# Altium PCB Tigershark 3D R2.3 - TR.PcbDoc (part 4 of 4)
Units mil, origin at the board's own origin, x right, y up, seen from the top; angles counter-clockwise.
Board outline 4100 x 4050 mil, 4 copper layers (Top Layer, Groun Plane, Power Plane, Bottom Layer), stack 61.73 mil thick; 367 components, 240 nets, 1160 pads, 805 vias.
Unrouted connection lines stored in the file: 6.
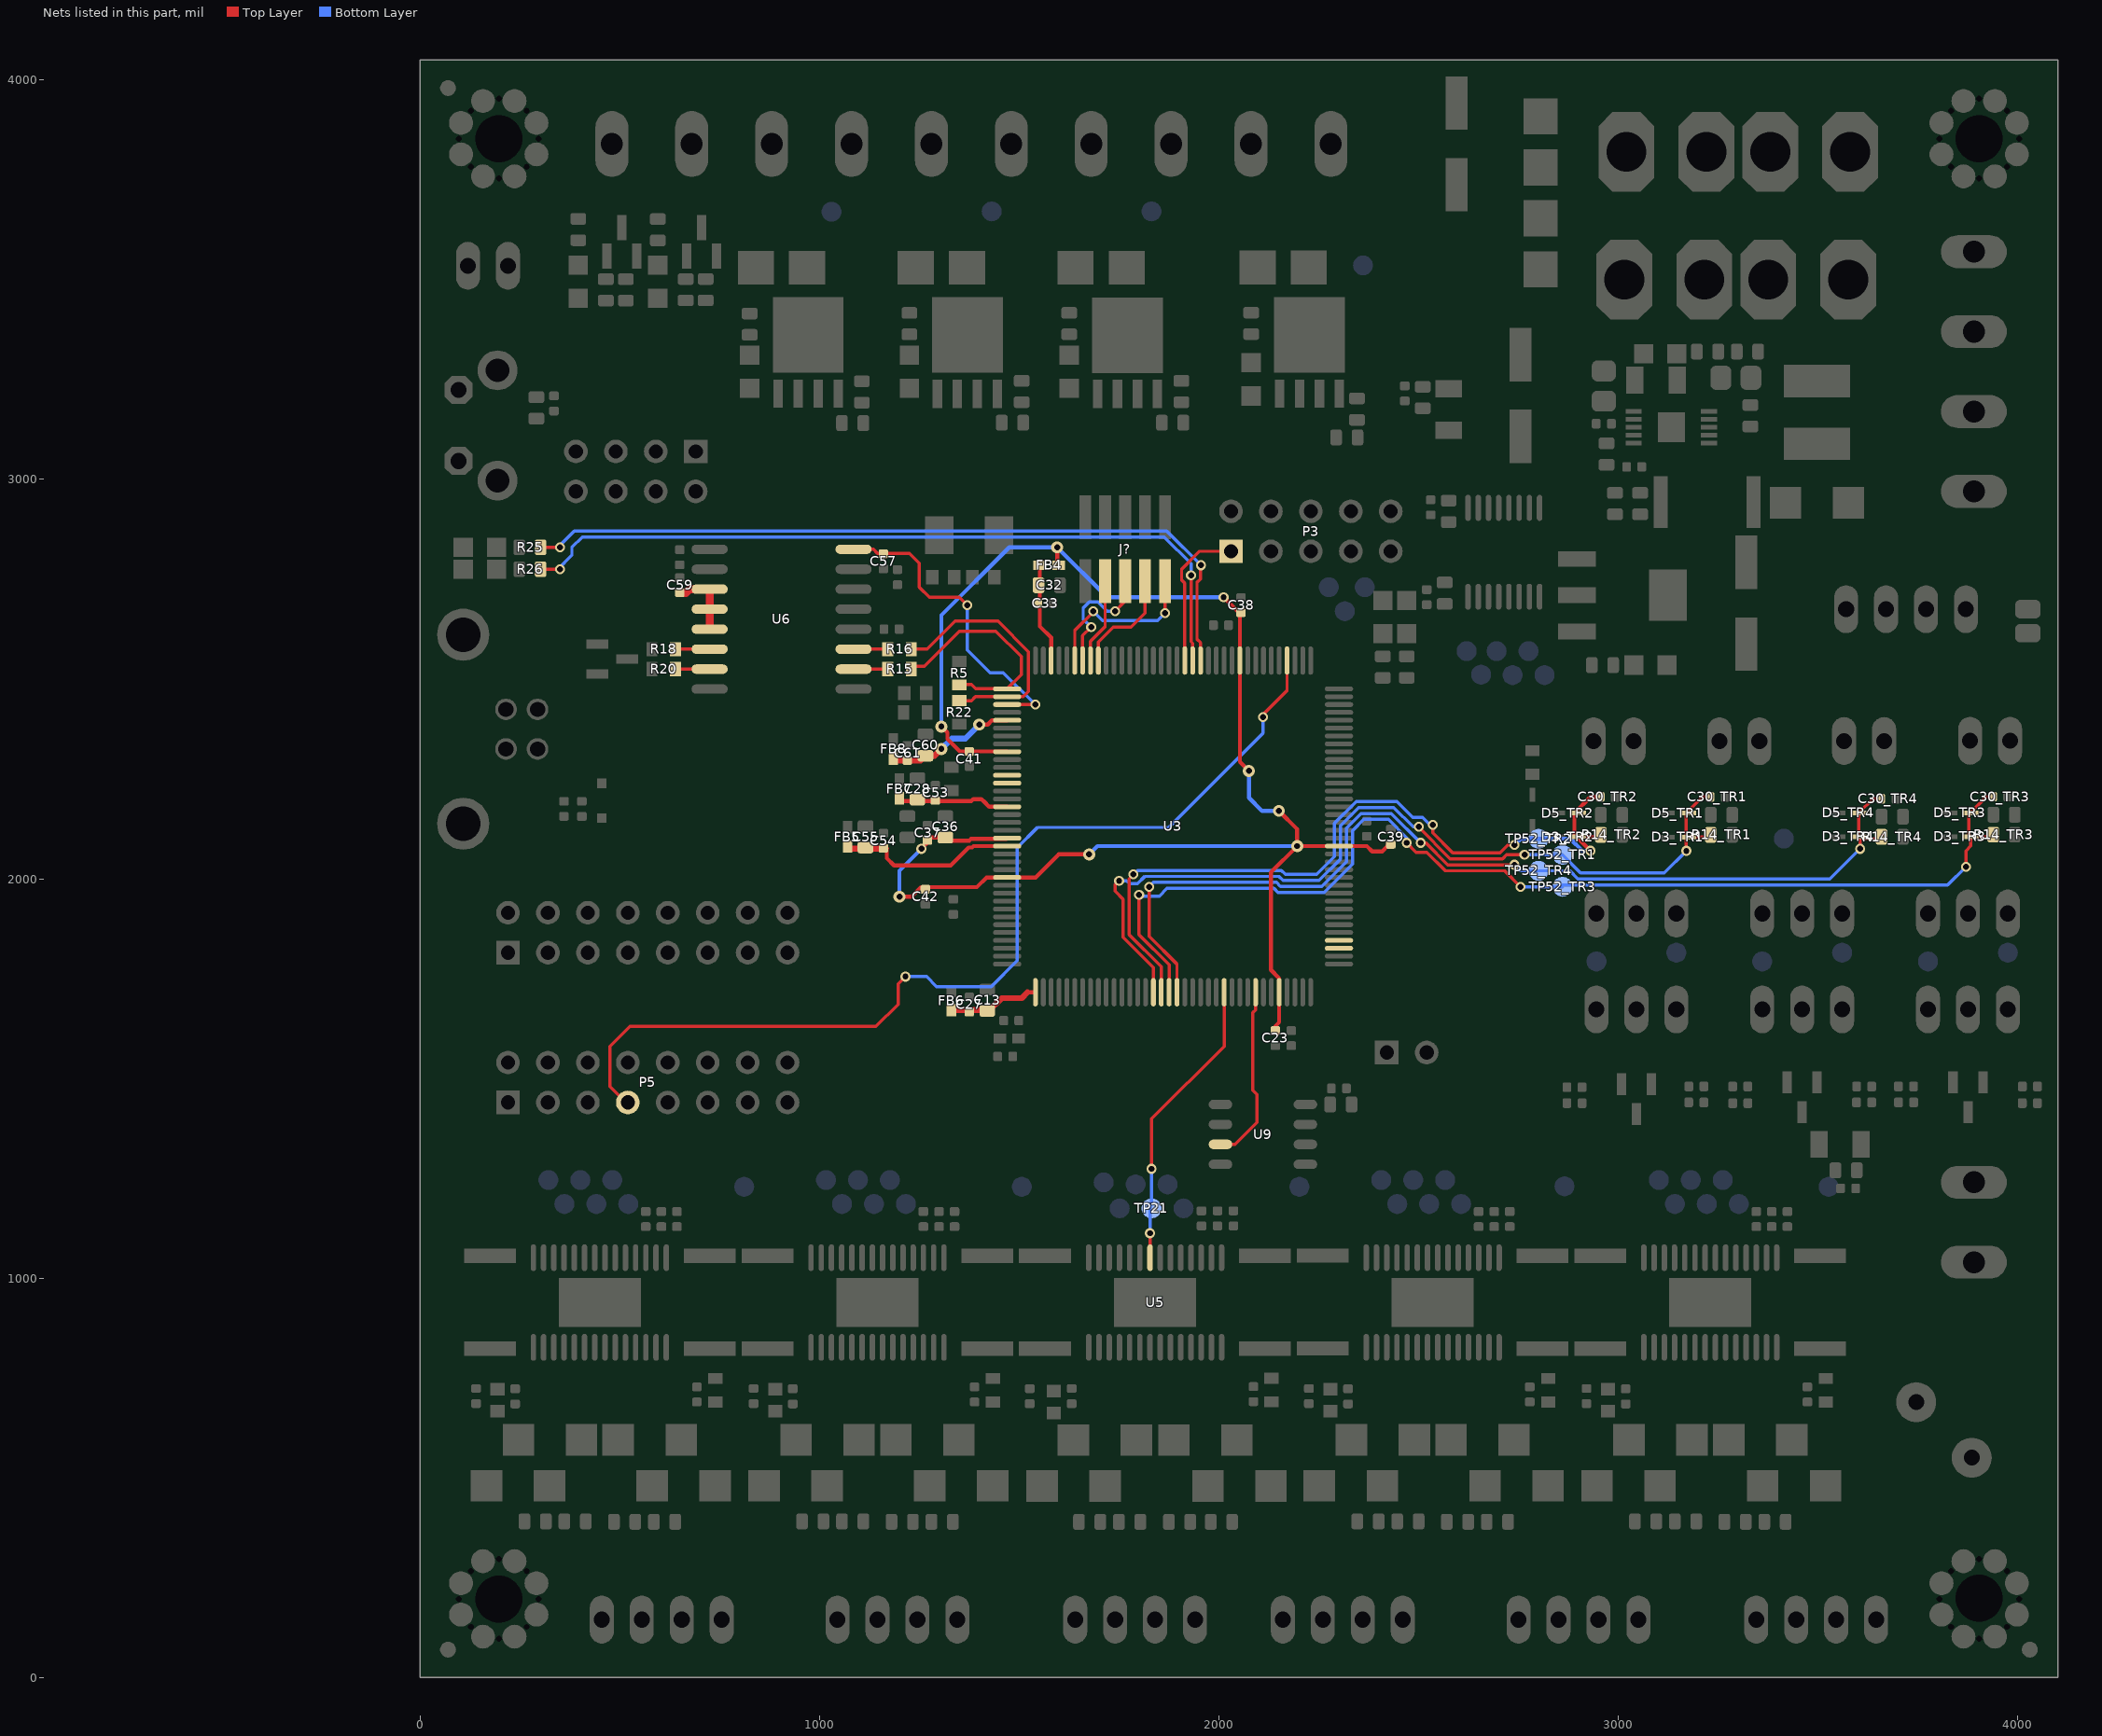
[diagram p6: the nets of this part, all layers, seen from the top]

## Via types
v1: diameter 30, hole 15, Top Layer to Bottom Layer, tented both sides, 465 vias
v2: diameter 25, hole 15, Top Layer to Bottom Layer, tented both sides, 192 vias
v3: diameter 19.68, hole 7.87, Top Layer to Bottom Layer, 75 vias
v4: diameter 25, hole 15, Top Layer to Bottom Layer, 61 vias
v5: diameter 30, hole 15, Top Layer to Bottom Layer, 9 vias
v6: diameter 45, hole 20, Top Layer to Bottom Layer, tented both sides, 2 vias
v7: diameter 25, hole 15, Top Layer to Bottom Layer, tented bottom, 1 vias

## Nets (pads, with @x,y where several pads share a name; then routed paths per layer and width w, separated by ;. In a path a pad name is that pad's centre, name@x,y a point inside that pad or via, vN(x,y) a via of type N, cw(c..) or ccw(c..) an arc to the next point about the centre after c; other vN are vias at no path point) (continued)
STEP_Z: TP21.1 U3.97 U5.22 | length 740.5
  Top Layer w8: U5.22@1827.24,1052.17 v4(1827.24,1112.61) ; v4(1831.26,1273.74) 1831.26,1398.98 2012.95,1580.67 U3.97@2012.95,1715.75
  Bottom Layer w8: v4(1827.24,1112.61) 1827.24,1181.72 1831.26,1185.74 v4(1831.26,1273.74)
TC_CS1: U3.111
TC_CS2: U3.112
TCK/SWDCLK: J?.4@1815,2745.08 U3.28 | length 273.4
  Top Layer w8: U3.28@1697.99,2546.46 1697.99,2592.99 1735,2630 1780,2630 1815,2665 J?.4@1815,2745.08
TDI: J?.8 U3.29 | length 213.8
  Top Layer w8: U3.29@1678.31,2546.46 1678.31,2594.52 1715,2631.21 J?.8@1715,2745.08
TDO/SWO: J?.6@1765,2745.08 U3.30 | length 330.4
  Top Layer w8: U3.30@1658.62,2546.46 1658.62,2608.62 v2(1680,2630) ; v2(1740,2670) 1765,2695 J?.6@1765,2745.08
  Bottom Layer w8: v2(1680,2630) 1660,2650 1660,2678.23 1675.27,2693.5 1696.5,2693.5 1720,2670 v2(1740,2670)
THERM_AN1: C30_TR1.1 D3_TR1.1 D5_TR1.2 R14_TR1.2 TP52_TR1.1 U3.88 | length 2217.3
  Top Layer w8: v2(1750,1995) 1740,1985 1740,1968.79 1760,1948.79 1760,1853.79 1835.79,1778 U3.88@1835.79,1715.75 ; v2(2500,2130) 2500,2128.79 2578.79,2050 2710,2050 2720,2060 v2(2765,2060) ; v2(3170,2070) 3169.53,2070.47 D3_TR1.1@3169.53,2104.53 ; C30_TR1.1@3229.25,2205 3210,2205 3169.53,2164.53 D3_TR1.1@3169.53,2104.53 ; R14_TR1.2@3231.18,2110 3225.71,2104.53 D3_TR1.1@3174.53,2104.53 D3_TR1.1@3169.53,2104.53
  Bottom Layer w8: v2(1750,1995) 1768.55,1995 1776.16,1987.39 1795.62,1987.39 1814.12,2005.89 2150.17,2005.89 2160.17,1995.89 2250.74,1995.89 2304.05,2049.2 2304.05,2132.84 2349.71,2178.5 2437.71,2178.5 2486.21,2130 v2(2500,2130) ; v2(2765,2060) TP52_TR1.1@2860,2060 2905,2015 3115,2015 v2(3170,2070)
THERM_AN2: C30_TR2.1 D3_TR2.1 D5_TR2.2 R14_TR2.2 TP52_TR2.1 U3.89 | length 1959.2
  Top Layer w8: v2(1785.89,2010.89) 1775,2000 1775,1860 1855.47,1779.53 U3.89@1855.47,1715.75 ; v2(2535,2135) 2535,2115 2585,2065 2703.79,2065 2723.79,2085 v2(2740,2085)
  Top Layer w10: v2(2930,2070) 2899.53,2100.47 D3_TR2.1@2899.53,2105 ; C30_TR2.1@2954.25,2205 2930,2205 2889.53,2164.53 2889.53,2105 D3_TR2.1@2899.53,2105 ; R14_TR2.2@2956.18,2110 2951.18,2105 D3_TR2.1@2899.53,2105
  Bottom Layer w8: v2(1785.89,2010.89) 1795.89,2020.89 2156.38,2020.89 2166.38,2010.89 2244.53,2010.89 2289.05,2055.41 2289.05,2139.05 2343.5,2193.5 2445.14,2193.5 2485.14,2153.5 2509.73,2153.5 2528.23,2135 v2(2535,2135)
  Bottom Layer w10: v2(2740,2085) 2755,2100 TP52_TR2.1@2800,2100 2880,2100 2910,2070 v2(2930,2070)
THERM_AN3: C30_TR3.1 D3_TR3.1 D5_TR3.2 R14_TR3.2 TP52_TR3.1 U3.90 | length 2859.3
  Top Layer w8: v2(1800,1960) 1800,1860 1875.16,1784.84 U3.90@1875.16,1715.75 ; v2(2470,2090) 2493.5,2066.5 2519.86,2066.5 2566.36,2020 2715,2020 v2(2755,1980) ; v2(3870,2030) 3870,2070 3882.05,2082.05 D3_TR3.1@3882.05,2105.47 ; R14_TR3.2@3935.94,2100.47 3930.95,2105.47 D3_TR3.1@3882.05,2105.47 ; C30_TR3.1@3936.77,2205.47 3920.94,2205.47 3877.05,2161.57 3877.05,2105.47 D3_TR3.1@3882.05,2105.47
  Bottom Layer w8: v2(1800,1960) 1803.5,1956.5 1850.61,1956.5 1870,1975.89 2137.74,1975.89 2147.74,1965.89 2263.17,1965.89 2334.05,2036.77 2334.05,2120.41 2362.14,2148.5 2424.07,2148.5 2470,2102.57 v2(2470,2090) ; v2(2755,1980) TP52_TR3.1@2860,1980 2860,1984.03 3824.03,1984.03 v2(3870,2030)
THERM_AN4: C30_TR4.1 D3_TR4.1 D5_TR4.2 R14_TR4.2 TP52_TR4.1 U3.91 | length 2518.4
  Top Layer w8: v2(1825,1980) 1825,1856.21 1894.84,1786.37 U3.91@1894.84,1715.75 ; v2(2505,2090) 2517.57,2090 2572.57,2035 v2(2740,2035) ; D3_TR4.1@3601.38,2105.47 3601.38,2139.33 3601.97,2139.92 D5_TR4.2@3601.97,2160.47 ; D3_TR4.1@3602.05,2105.47 D3_TR4.1@3602.05,2100.47 ; D5_TR4.2@3602.05,2165 3637.52,2200.47 C30_TR4.1@3656.77,2200.47 ; v2(3605,2075) 3605,2097.52 D3_TR4.1@3602.05,2100.47 ; R14_TR4.2@3655.94,2095.47 3650.95,2100.47 D3_TR4.1@3602.05,2100.47
  Bottom Layer w8: v2(1825,1980) 1835.89,1990.89 2143.95,1990.89 2153.95,1980.89 2256.96,1980.89 2319.05,2042.99 2319.05,2126.63 2355.93,2163.5 2431.5,2163.5 v2(2505,2090) ; v2(2740,2035) 2755,2020 TP52_TR4.1@2800,2020 2878.79,2020 2898.79,2000 2904.03,2000 2905,1999.03 3529.03,1999.03 v2(3605,2075)
TMS/SWDIO: J?.2@1865,2745.08 U3.31 | length 394.6
  Top Layer w8: U3.31@1638.94,2546.46 1638.94,2622.17 v2@1685.88,2669.12 ; v2(1865,2665) J?.2@1865,2720.08
  Bottom Layer w8: v2(1685,2670) 1708.5,2646.5 1846.5,2646.5 v2(1865,2665)
TXD0: P5.7 U3.4 | length 2534.8
  Top Layer w8: P5.7@500,1440 500,1455 475,1480 475,1580 525,1630 1141.36,1630 1197,1685.64 1197,1737 v2(1215,1755) ; v2(2110,2405) 2110,2411.21 2170.43,2471.65 U3.4@2170.43,2546.46
  Bottom Layer w8: v2(1215,1755) 1268.23,1755 1293.23,1730 1430,1730 1495,1795 1495,2077.98 1545.52,2128.5 1874.71,2128.5 2110.61,2364.39 2110,2365 v2(2110,2405)
TXD1: P3.1 U3.17 | length 374.2
  Top Layer w8: U3.17@1914.53,2546.46 1914.53,2740.47 1906.5,2748.5 1906.5,2775.29 1951.21,2820 P3.1@2030,2820
UD_N: R18.1 U6.6 | length 85.4
  Top Layer w8: R18.1@639.53,2575 U6.6@724.88,2575
UD_P: R20.1 U6.7 | length 85.4
  Top Layer w8: R20.1@639.53,2525 U6.7@724.88,2525
UI_N: R16.2 U6.11 | length 85.4
  Top Layer w8: U6.11@1085.12,2575 1135,2575 R16.2@1170.47,2575
UI_P: R15.2 U6.10 | length 85.4
  Top Layer w8: U6.10@1085.12,2525 1150,2525 R15.2@1170.47,2525
UMCU_N: R16.1 R22.1 U3.38 | length 631.4
  Top Layer w8: R16.1@1229.53,2575 1269.64,2575 1339.64,2645 1441.56,2645 1446.51,2645 1523,2568.51 1523,2468.91 1510,2455.91 U3.38@1469.65,2455.91 1390.28,2455.91 1380,2445.63 R22.1@1355,2445.63
UMCU_P: R5.1 R15.1 U3.37 | length 555.6
  Top Layer w8: R15.1@1229.53,2525 1237.03,2532.5 1262.5,2532.5 1350,2620 1441.1,2620 1505,2556.1 1505,2510.94 U3.37@1469.65,2475.59 1390.98,2475.59 1380,2486.57 R5.1@1355,2486.57
USB_RX: R25.1 U3.15 | length 1957.2
  Top Layer w8: R25.1@301.77,2830 v2(350,2830) ; U3.15@1953.9,2546.46 1953.9,2591.1 1945,2600 1945,2741.77 1953.5,2750.27 1953.5,2783.5 v2(1955,2785)
  Bottom Layer w8: v2@345,2830 386,2871 1869,2871 v2(1955,2785)
USB_TX: R26.1 U3.16 | length 1950.4
  Top Layer w8: R26.1@301.77,2775 v2(350,2775) ; v2(1930,2760) 1930,2593.79 1934.21,2589.57 U3.16@1934.21,2546.46
  Bottom Layer w8: v2@345,2775 380,2810 380,2830 406,2856 1862.79,2856 1930,2788.79 v2(1930,2760)
VBUS: C57.1 U3.39 U6.16 | length 787.2
  Top Layer w8: U6.16@1085.12,2825 1135,2825 1145,2815 1225,2815 1250,2790 1250,2730 1275,2705 1350,2705 v2(1370,2685) ; U3.39@1469.65,2436.22 v2@1540,2436.22
  Bottom Layer w8: v2(1370,2685) 1370,2572.87 1426.77,2516.1 1460,2516.1 v2(1540,2436.1)
VDD1: C59.1 U6.3 U6.4 U6.5 | length 178.6
  Top Layer w20: C59.1@650,2716 666,2716 675,2725 U6.3@724.88,2725 U6.4@724.88,2675 U6.5@724.88,2625
VDDANA: C13.2 C27.1 FB6.2 U3.73 | length 228.3
  Top Layer w10: 1520.75,1715.75 U3.73@1539.79,1715.75
  Top Layer w15: FB6.2@1330,1671.1 1426.1,1671.1 1456.1,1701.1 1506.1,1701.1 1520.75,1715.75
VDDBU: C28.2 C53.1 FB7.2 U3.52 | length 282.5
  Top Layer w10: FB7.2@1200,2201.38 1206.88,2194.5 1379.85,2194.5 1384.85,2199.5 1405.15,2199.5 1410.15,2194.5 1410.5,2194.5 1424.68,2180.32 U3.52@1469.65,2180.32
VDDIN: C54.1 C55.2 FB5.2 U3.57 | length 441.4
  Top Layer w8: C54.1@1167.77,2078.23 C54.1@1170,2076
  Top Layer w10: C54.1@1168.37,2075 1168.37,2051.63 1186.5,2033.5 1328.5,2033.5 1373.5,2078.5 1382.19,2078.5 1385.58,2081.89 U3.57@1469.65,2081.89
  Top Layer w15: FB5.2@1070,2081.38 1076.38,2075 C54.1@1153.37,2075
VDDOUT: C23.1 C36.2 C37.1 C38.1 C39.1 C41.1 C42.1 FB4.1 U3.10 U3.45 U3.56 U3.61 U3.104 U3.124 | length 4257.3
  Top Layer w10: v1(1200,1955) 1230,1955 1254,1979 1394,1979 1418.15,2003.15 U3.61@1469.65,2003.15 1540.78,2003.15 1598.73,2061.1 v1(1675,2061.1) ; v2(1255,2075) C37.1@1270,2090 ; C37.1@1270,2098.54 1270,2101 1272.23,2103.23 C36.2@1315,2103.23 1322.73,2095.5 1375.15,2095.5 1379.44,2099.8 1467.87,2099.8 U3.56@1469.65,2101.57 ; v1(1305,2381.1) 1320,2366.1 1320,2350 1351,2319 1468.76,2319 U3.45@1469.65,2318.11 ; v1(1595,2830) 1595,2788.62 FB4.1@1598.62,2785 ; v2(2011.58,2705) 2055,2661.58 2052.32,2658.9 U3.10@2052.32,2546.46 2052.32,2292.68 v1(2075,2270) ; C23.1@2141.1,1620.1 2141.1,1631.1 2150.75,1640.75 U3.104@2150.75,1715.75 2150.75,1750.91 2130,1771.66 2130,2016.1 v1(2195.79,2081.89) ; v1(2150,2170) 2195.79,2124.21 v1(2195.79,2081.89) ; C39.1@2435,2086 2423,2086 2423,2082.85 2408.65,2068.5 2383.46,2068.5 2370.07,2081.89 U3.124@2300.35,2081.89 v1(2195.79,2081.89)
  Bottom Layer w10: v1(1200,1955) 1200,2020 v2(1255,2075) ; v1(1305,2381.1) 1305,2660 1475,2830 v1(1595,2830) 1720,2705 v2(2011.58,2705) ; v1(1675,2061.1) 1695.79,2081.89 v1(2195.79,2081.89) ; v1(2075,2270) 2075,2202.68 2107.68,2170 v1(2150,2170)
VDDPLL: C32.2 C33.1 FB4.2 U3.34 | length 258.5
  Top Layer w10: FB4.2@1546.38,2791.1 1551.38,2786.1 1551.38,2632.14 1579.88,2603.63 U3.34@1579.88,2546.46
VDDUTMI: C60.2 C61.1 FB8.2 U3.41 | length 328.6
  Top Layer w10: v1(1400,2386.1) 1421.1,2386.1 1431.85,2396.85 U3.41@1469.65,2396.85
  Top Layer w15: FB8.2@1185,2301.38 1190.38,2296 1220,2296 1252.77,2296 C60.2@1265,2308.23 1288.23,2308.23 v1(1305,2325)
  Bottom Layer w15: v1(1305,2325) 1331.1,2351.1 1365,2351.1 v1(1400,2386.1)
WP#: U3.101 U9.3 | length 446.7
  Top Layer w8: U9.3@2003.7,1335 2040,1335 2095,1390 2095,1460 2085,1470 2085,1665 2091.69,1671.69 U3.101@2091.69,1715.75
XIN32: U3.48
XOUT32: U3.49
pads on no net: FD1.1 FD2.1 FD3.1 H1.0 H2.0 H3.0 H4.0 J?.7 U3.32 U3.127 U3.128 U3.129 U5.18 U5.19 U5.23 U5.27 U7_M1.18 U7_M1.19 U7_M1.23 U7_M1.27 U7_M2.18 U7_M2.19 U7_M2.23 U7_M2.27 U7_M3.18 U7_M3.19 U7_M3.23 U7_M3.27 U7_M4.18 U7_M4.19 U7_M4.23 U7_M4.27

## Polygon pours and split planes (outlines as drawn)
GND on Top Layer "Top Layer-No Net" (solid, remove dead copper, pour order 175): 2880,3030 2735,3030 2710,3055 2665,3100 2540,3100 2455,3100 2450,3100 2450,3210 2535,3210 2535,3200 2620,3200 2620,3180 2880,3180
+12VCC2 on Top Layer "Top Layer-No Net" (solid, remove dead copper, pour order 172): 3290,3350 3290,3640 3095,3640 2875,3640 2875,3595 2775,3595 2735,3595 2735,3550 2735,3510 2630,3510 2630,3450 2630,3245 2455,3245 2455,3220 2540,3220 2540,3205 2630,3205 2630,3185 2830,3185 2980,3185 2985,3190 2985,3217.71 2877.29,3217.71 2875,3220 2875,3350
+5VCC on Top Layer "Top Layer-No Net" (solid, remove dead copper, pour order 170): 2965,2775 2825,2775 2825,3020 2885,3020 2885,2880 2885,2850 2965,2850
+12VCC3 on Top Layer "Top Layer-No Net" (solid, remove dead copper, pour order 168): 3290,3650 2880,3650 2875,3655 2875,3845 2745,3845 2745,3810 2560,3810 2555,3805 2555,3670 2505,3670 2505,4030 2510,4025 3290,4025
FGND on Top Layer "Top Layer-No Net" (solid, remove dead copper, pour order 166): 3980,2630 3980,2600 3940,2600 3940,2485 4080,2485 4080,2630
GND on Top Layer "Top Layer-No Net" (solid, remove dead copper, pour order 164): 2840,2750 2840,2675 2840,2670 3075,2670 3075,2645 3170,2645 3170,2670 3455,2670 3455,2750 3500,2750 3825,2750 3825,2610 3970,2610 3965,2615 3965,2645 4080,2645 4080,3040 3735,3040 3730,3035 3730,2910 3730,2845 3070,2845 3070,2755 3075,2750
NetF1_1 on Top Layer "Top Layer-No Net" (solid, remove dead copper, pour order 160): 4080,3045 4080,3415 3815,3415 3795,3435 3690,3540 3690,3590 3690,3620 3670,3640 3595,3640 3300,3640 3300,3530 3300,3360 3300,3348.73 3595,3348.73 3606.27,3348.73 3609.65,3345.35 3730,3225 3730,3045
3.3VCC on Top Layer "Top Layer-No Net" (solid, remove dead copper, pour order 146): 2840,2660 2840,2505 2965,2505 2965,2575 3190,2575 3190,2510 3625,2510 3625,2695 3625,2740 3475,2740 3475,2660
NetF2_1 on Top Layer "Top Layer-No Net" (solid, remove dead copper, pour order 142): 3300,4030 3300,3650 3675,3650 3700,3625 3700,3545 3820,3425 4080,3425 4080,4030
GND on Top Layer "Top Layer-No Net" (solid, remove dead copper, pour order 125): 2310,3140 2280,3140 2280,3170 2280,3255 2130,3255 2130,3175 2125,3170 2050,3170 2050,3080 2215,3080 2310,3080
GND on Top Layer "Top Layer-No Net" (solid, remove dead copper, pour order 125): 1884.5,3109.19 1884.5,3169.19 1824.5,3169.19 1824.5,3254.19 1674.5,3254.19 1674.5,3174.19 1669.5,3169.19 1594.5,3169.19 1594.5,3079.19 1759.5,3079.19 1884.5,3079.19
GND on Top Layer "Top Layer-No Net" (solid, remove dead copper, pour order 125): 1483.5,3109.61 1483.5,3169.61 1423.5,3169.61 1423.5,3254.61 1273.5,3254.61 1273.5,3174.61 1268.5,3169.61 1193.5,3169.61 1193.5,3079.61 1358.5,3079.61 1483.5,3079.61
GND on Top Layer "Top Layer-No Net" (solid, remove dead copper, pour order 125): 1085,3110 1085,3170 1025,3170 1025,3255 875,3255 875,3175 870,3170 795,3170 795,3080 960,3080 1085,3080
GND on Top Layer "Mechanical 15-No Net" (solid, remove dead copper, pour order 58): 2885,1375 2885,855 3025,855 3025,875 3185,875 3390,875 3390,785 3405,770 3465,710 3495,710 3495,775 3440,775 3440,850 3575,850 3575,1375 3325,1375 3325,1150 3440,1150 3440,1005 3265,1005 3080,1005 3080,1040 3080,1375
GND on Top Layer "Mechanical 15-No Net" (solid, remove dead copper, pour order 58): 2190,1375 2190,855 2330,855 2330,875 2490,875 2695,875 2695,785 2710,770 2770,710 2800,710 2800,775 2745,775 2745,850 2880,850 2880,1375 2630,1375 2630,1150 2745,1150 2745,1005 2570,1005 2385,1005 2385,1040 2385,1375
GND on Top Layer "Top Layer-No Net" (solid, remove dead copper, pour order 112): 770,3595 725,3595 725,3525 690,3525 690,3470 740,3470 740,3425 725,3425 725,3255 790,3255 790,3340 790,3455 775,3455 775,3595
GND on Top Layer "Top Layer-No Net" (solid, remove dead copper, pour order 110): 525,3595 525,3525 490,3525 490,3485 490,3470 540,3470 540,3420 525,3420 525,3350 615,3260 620,3255 705,3255 705,3420 605,3420 565,3420 565,3595
+12VCC2 on Top Layer "Top Layer-No Net" (solid, remove dead copper, pour order 83): 1650,3390 1595,3390 1595,3460 1580,3460 1580,3495 1580,3600 1580,4030 1585,4030 1745,4030 1745,3980 1745,3695 1700,3695 1700,3595 1700,3480 1650,3480
+12VCC2 on Top Layer "Top Layer-No Net" (solid, remove dead copper, pour order 83): 1250,3390 1195,3390 1195,3460 1180,3460 1180,3495 1180,3600 1180,4030 1185,4030 1345,4030 1345,3980 1345,3695 1300,3695 1300,3595 1300,3480 1250,3480
+12VCC2 on Top Layer "Top Layer-No Net" (solid, remove dead copper, pour order 83): 850,3390 795,3390 795,3460 780,3460 780,3495 780,3600 780,4030 785,4030 945,4030 945,3980 945,3695 900,3695 900,3595 900,3480 850,3480
HTBD on Top Layer "Bottom Layer-No Net" (solid, remove dead copper, pour order 75): 2380.5,3265.81 2620.5,3265.81 2620.5,3665.81 2500.5,3665.81 2500.5,4035.81 2430.02,4030.69 2410.5,4035.81 2150.5,4035.81 2150.5,3755.81 2150.5,3480.81 2125.5,3480.81 2125.5,3325.81 2110.5,3325.81 2110.5,3260.81 2055.5,3260.81 2055.5,3180.81 2132.63,3180.81 2125.5,3180.81 2125.5,3260.81 2130.5,3265.81 2375.5,3265.81
GND on Top Layer "Bottom Layer-No Net" (solid, pour order 52): 2565,3805 2565,3670 2630,3670 2630,3605 2630,3520 2725,3520 2725,3605 2830,3605 2860,3605 2860,3710 2860,3835 2755,3835 2755,3805
GND on Top Layer "Mechanical 15-No Net" (solid, remove dead copper, pour order 58): 1495.26,1375 1495.26,855 1635.26,855 1635.26,875 1795.26,875 2000.26,875 2000.26,785 2015.26,770 2075.26,710 2105.26,710 2105.26,775 2050.26,775 2050.26,850 2185.26,850 2185.26,1375 1935.26,1375 1935.26,1150 2050.26,1150 2050.26,1005 1875.26,1005 1690.26,1005 1690.26,1040 1690.26,1375
GND on Top Layer "Mechanical 15-No Net" (solid, remove dead copper, pour order 59): 800,1375 800,855 940,855 940,875 1100,875 1305,875 1305,785 1320,770 1380,710 1410,710 1410,775 1355,775 1355,850 1490,850 1490,1375 1240,1375 1240,1150 1355,1150 1355,1005 1180,1005 995,1005 995,1040 995,1375
GND on Top Layer "Mechanical 15-No Net" (solid, remove dead copper, pour order 60): 105,1375 105,855 245,855 245,875 405,875 610,875 610,785 625,770 685,710 715,710 715,775 660,775 660,850 795,850 795,1375 545,1375 545,1150 660,1150 660,1005 485,1005 300,1005 300,1040 300,1375
GND on Top Layer "Top Layer-No Net" (solid, remove dead copper, pour order 61): 3805,1090 3805,925 3830,925 3830,905 3830,810 3830,350 3955,350 4076.06,350 4076.06,663.83 4080,670.41 4080,780 4080,915 4080,943.17 4080,1090 4080,1110 4080,1120 3805,1120 3805,1110
+12VCC1 on Top Layer "Top Layer-No Net" (solid, remove dead copper, pour order 54): 4080,1375 3585,1375 3585,350 3810,350 3815,350 3820,350 3820,915 3795,915 3795,1100 3795,1125 4061.95,1125 4080,1125 4080,1130
GND on Top Layer "SMPS" (solid, pour order 62): 3255,3079 3227,3051 3139,3051 3089,3001 3089,2878 3214,2878 3263,2927 3265,2929 3265,3062 3265,3079
NetC40_2 on Top Layer "SMPS" (solid, pour order 55): 3269,3145 3291.77,3122.23 3336,3122.23 3442.23,3016 3458,3016 3474,3000 3474,2924 3512,2886 3598,2886 3616,2904 3616,2986 3616,3099 3570,3145 3559,3156 3287,3156 3272,3156 3269,3153
NetD2_A on Top Layer "SMPS" (solid, pour order 53): 3272,3112 3272,2976 3272,2927 3321,2878 3434,2878 3458,2902 3458,2991 3446,3003 3429,3003 3348,3084 3321,3111 3275,3111
HTR0 on Top Layer "Bottom Layer-No Net" (solid, remove dead copper, pour order 42): 875,3260 1070,3260 1070,3270 1185,3270 1185,3465 1185,3605 1185,4030 950,4030 950,3690 915,3690 910,3690 905,3690 905,3470 855,3470 855,3285 795,3285 795,3180 870,3180 870,3260
HTR1 on Top Layer "Bottom Layer-No Net" (solid, remove dead copper, pour order 41): 1275,3260 1470,3260 1470,3270 1585,3270 1585,3465 1585,3605 1585,4030 1350,4030 1350,3690 1315,3690 1310,3690 1305,3690 1305,3470 1255,3470 1255,3285 1195,3285 1195,3180 1270,3180 1270,3260
HTRA on Top Layer "Bottom Layer-No Net" (solid, remove dead copper, pour order 40): 1670,3265 1865,3265 1865,3275 1980,3275 1980,3470 1980,3610 1980,4035 1745,4035 1745,3695 1710,3695 1705,3695 1700,3695 1700,3475 1650,3475 1650,3290 1590,3290 1590,3185 1665,3185 1665,3265
+12VCC3 on Top Layer "Bottom Layer-No Net" (solid, remove dead copper, pour order 50): 1985,4030 1985,3885 1985,3475 1990,3470 2055,3470 2055,3400 2115,3400 2115,3470 2120,3470 2120,3490 2145,3490 2145,4035
+12VCC2 on Bottom Layer "Top Layer-No Net" (solid, remove dead copper, pour order 179): 2630,3510 2735,3510 2735,3595 2875,3595 2875,3640 3290,3640 3290,3580 3290,3360 3255,3360 2875,3360 2875,3335 2875,3185 2780,3185 2630,3185 2630,3220 2630,3510
NetF2_1 on Bottom Layer "Top Layer-No Net" (solid, remove dead copper, pour order 142): 3300,4030 3300,3650 3675,3650 3700,3625 3700,3545 3820,3425 4080,3425 4080,4030
NetF1_1 on Bottom Layer "Top Layer-No Net" (solid, remove dead copper, pour order 160): 4080,3045 4080,3415 3815,3415 3795,3435 3690,3540 3690,3590 3690,3620 3670,3640 3595,3640 3300,3640 3300,3530 3300,3360 3365,3360 3595,3360 3730,3225 3730,3045
GND on Bottom Layer "Top Layer-No Net" (solid, remove dead copper, pour order 158): 3715,3225 3590,3350 3490,3350 3350,3350 2985,3350 2930,3350 2885,3305 2885,2885 2920,2850 3105,2850 3575,2850 3615,2890 3615,3140 3400,3140 3390,3140 3390,3185 3390,3225
+5VCC on Bottom Layer "Top Layer-No Net" (solid, remove dead copper, pour order 150): 3625,2600 3715,2600 3715,2740 3715,3215 3400,3215 3400,3150 3625,3150
HTRA on Bottom Layer "Top Layer-No Net" (solid, remove dead copper, pour order 99): 1670,3260 1985,3260 1985,4030 1750,4030 1750,3690 1705,3690 1705,3470 1655,3470 1655,3260
HTR1 on Bottom Layer "Top Layer-No Net" (solid, remove dead copper, pour order 99): 1270,3260 1585,3260 1585,4030 1350,4030 1350,3690 1305,3690 1305,3470 1255,3470 1255,3260
HTR0 on Bottom Layer "Top Layer-No Net" (solid, remove dead copper, pour order 99): 870,3260 1185,3260 1185,4030 950,4030 950,3690 905,3690 905,3470 855,3470 855,3260
+12VCC2 on Bottom Layer "Top Layer-No Net" (solid, remove dead copper, pour order 92): 1590,4030 1590,3915 1590,3485 1700,3485 1700,3695 1745,3695 1745,4030
+12VCC2 on Bottom Layer "Top Layer-No Net" (solid, remove dead copper, pour order 92): 1190,4030 1190,3915 1190,3485 1300,3485 1300,3695 1345,3695 1345,4030
+12VCC2 on Bottom Layer "Top Layer-No Net" (solid, remove dead copper, pour order 88): 780,4030 945,4030 945,3975 945,3695 900,3695 900,3670 900,3475 850,3475 850,3450 850,3390 795,3390 795,3460 780,3460 780,4030
GND on Bottom Layer "Mechanical 15-No Net" (solid, remove dead copper, pour order 39): 2886.31,1375 3025,1375 3575,1375 3575,1225 3575,700 3540,700 2885,700 2885,1360 2885,1375
GND on Bottom Layer "Mechanical 15-No Net" (solid, remove dead copper, pour order 44): 2191.31,1375 2330,1375 2880,1375 2880,1225 2880,700 2845,700 2190,700 2190,1360 2190,1375
GND on Bottom Layer "Mechanical 15-No Net" (solid, remove dead copper, pour order 45): 1496.57,1375 1635.26,1375 2185.26,1375 2185.26,1225 2185.26,700 2150.26,700 1495.26,700 1495.26,1360 1495.26,1375
GND on Bottom Layer "Mechanical 15-No Net" (solid, remove dead copper, pour order 47): 801.31,1375 940,1375 1490,1375 1490,1225 1490,700 1455,700 800,700 800,1360 800,1375
GND on Bottom Layer "Mechanical 15-No Net" (solid, remove dead copper, pour order 49): 106.31,1375 245,1375 795,1375 795,1225 795,700 760,700 105,700 105,1360 105,1375
+12VCC1 on Bottom Layer "Mechanical 15-No Net" (solid, remove dead copper, pour order 51): 4080,1360 4080,1375 3585,1375 3585,1360 3585,690 3560,690 20,690 20,325 195,325 200,330 375,330 4080,330
HTBD on Bottom Layer "Bottom Layer-No Net" (solid, remove dead copper, pour order 43): 2620.5,3075.5 2620.5,3554.5 2580,3595 2160,3595 2125.5,3560.5 2125.5,3480.81 2125.5,3140.81 2125.5,3074.5 2165,3035 2580,3035
+12VCC3 on Bottom Layer "Bottom Layer-No Net" (solid, remove dead copper, pour order 46): 2755,4025 3285,4025 3285,3650 2860,3650 2865,3605 2755,3605 1985,3605 1985,4030 2755,4030
+12VCC3 on Power Plane (split plane): 4079.9,3620.1 2010.1,3620.1 2010.1,4025 2009.71,4026.95 2008.6,4028.6 2007.31,4029.9 4079.9,4029.9
+5VCC on Power Plane (split plane): 3589.9,2850 3589.9,2770.1 2837.11,2770.1 2798.6,2808.6 2796.95,2809.71 2795,2810.1 2495.1,2810.1 2495.1,3019.9 2895,3019.9 2896.95,3020.29 2898.6,3021.4 2899.71,3023.05 2900.1,3025 2900.1,3182.89 2942.11,3224.9 3589.9,3224.9
+12VCC2 on Power Plane (split plane): 1999.9,4022.89 1999.9,3615 2000.29,3613.05 2001.4,3611.4 2003.05,3610.29 2005,3609.9 4079.9,3609.9 4079.9,2630.1 3720.1,2630.1 3720.1,2765 3719.71,2766.95 3718.6,2768.6 3716.95,2769.71 3715,2770.1 3600.1,2770.1 3600.1,2850 3600.1,3230 3599.71,3231.95 3598.6,3233.6 3596.95,3234.71 3595,3235.1 2940,3235.1 2938.05,3234.71 2936.4,3233.6 2891.4,3188.6 2890.29,3186.95 2889.9,3185 2889.9,3030.1 797.11,3030.1 770.1,3057.11 770.1,3245 769.71,3246.95 768.6,3248.6 766.95,3249.71 765,3250.1 305.1,3250.1 305.1,3440 305.1,3445 304.71,3446.95 303.6,3448.6 301.95,3449.71 300,3450.1 20.1,3450.1 20.1,4029.9 1992.89,4029.9
3.3VCC on Power Plane (split plane): 294.9,3245 295.29,3243.05 296.4,3241.4 298.05,3240.29 300,3239.9 759.9,3239.9 759.9,3055 760.29,3053.05 761.4,3051.4 791.4,3021.4 793.05,3020.29 795,3019.9 2484.9,3019.9 2484.9,2805 2485.29,2803.05 2486.4,2801.4 2488.05,2800.29 2490,2799.9 2792.89,2799.9 2831.4,2761.4 2833.05,2760.29 2835,2759.9 3709.9,2759.9 3709.9,2625 3710.29,2623.05 3711.4,2621.4 3713.05,2620.29 3715,2619.9 4079.9,2619.9 4079.9,1380.1 3580,1380.1 3578.05,1379.71 3576.4,1378.6 3575.29,1376.95 3574.9,1375 3574.9,945.1 20.1,945.1 20.1,3439.9 294.9,3439.9
+12VCC1 on Power Plane (split plane): 4079.9,20.1 20.1,20.1 20.1,934.9 3580,934.9 3581.95,935.29 3583.6,936.4 3584.71,938.05 3585.1,940 3585.1,1369.9 4079.9,1369.9
INPUT_GND on Groun Plane (split plane): 899.9,2817.89 899.9,2477.11 872.89,2450.1 545,2450.1 543.05,2449.71 541.4,2448.6 511.4,2418.6 510.29,2416.95 509.9,2415 509.9,2127.11 452.89,2070.1 220,2070.1 218.05,2069.71 216.4,2068.6 192.89,2045.1 20.1,2045.1 20.1,2699.9 370,2699.9 371.95,2700.29 373.6,2701.4 408.6,2736.4 409.71,2738.05 410.1,2740 410.1,2812.89 442.11,2844.9 872.89,2844.9
GND on Groun Plane (split plane): 4079.9,20.1 20.1,20.1 20.1,2034.9 74.9,2034.9 74.9,345 75.29,343.05 76.4,341.4 78.05,340.29 80,339.9 344.9,339.9 344.9,171.3 344.9,80 345.29,78.05 346.4,76.4 348.05,75.29 350,74.9 3755,74.9 3756.95,75.29 3758.6,76.4 3759.71,78.05 3760.1,80 3760.1,339.9 4025,339.9 4026.95,340.29 4028.6,341.4 4029.71,343.05 4030.1,345 4030.1,1655 4030.1,2405 4029.71,2406.95 4028.6,2408.6 3950.1,2487.11 3950.1,2707.89 4023.6,2781.4 4024.71,2783.05 4025.1,2785 4025.1,3355 4025.1,3700 4024.71,3701.95 4023.6,3703.6 4021.95,3704.71 4020,3705.1 3755.1,3705.1 3755.1,3970 3754.71,3971.95 3753.6,3973.6 3751.95,3974.71 3750,3975.1 325,3975.1 323.05,3974.71 321.4,3973.6 320.29,3971.95 319.9,3970 319.9,3730.1 80,3730.1 78.05,3729.71 76.4,3728.6 75.29,3726.95 74.9,3725 74.9,3297.11 20.1,3242.31 20.1,4029.9 4079.9,4029.9
GND on Groun Plane (split plane): 3744.9,3700 3745.29,3698.05 3746.4,3696.4 3748.05,3695.29 3750,3694.9 4014.9,3694.9 4014.9,3355 4014.9,2787.11 3941.4,2713.6 3940.29,2711.95 3939.9,2710 3939.9,2485 3940.29,2483.05 3941.4,2481.4 4019.9,2402.89 4019.9,1655 4019.9,350.1 3755,350.1 3753.05,349.71 3751.4,348.6 3750.29,346.95 3749.9,345 3749.9,85.1 355.1,85.1 355.1,171.3 355.1,345 354.71,346.95 353.6,348.6 351.95,349.71 350,350.1 85.1,350.1 85.1,2034.9 195,2034.9 196.95,2035.29 198.6,2036.4 222.11,2059.9 455,2059.9 456.95,2060.29 458.6,2061.4 518.6,2121.4 519.71,2123.05 520.1,2125 520.1,2412.89 547.11,2439.9 875,2439.9 876.95,2440.29 878.6,2441.4 908.6,2471.4 909.71,2473.05 910.1,2475 910.1,2820 909.71,2821.95 908.6,2823.6 878.6,2853.6 876.95,2854.71 875,2855.1 440,2855.1 438.05,2854.71 436.4,2853.6 401.4,2818.6 400.29,2816.95 399.9,2815 399.9,2742.11 367.89,2710.1 20.1,2710.1 20.1,3227.89 83.6,3291.4 84.71,3293.05 85.1,3295 85.1,3719.9 325,3719.9 326.95,3720.29 328.6,3721.4 329.71,3723.05 330.1,3725 330.1,3964.9 3744.9,3964.9

## Keep-outs
Keep-Out Layer:
  lines w10: 20,20 4080,20 4080,4030 20,4030 20,20

## Other copper
Groun Plane (plane layer: these items are gaps in the copper):
  lines w10: 0,2050 10,2040 195,2040 220,2065 303.75,2065 455,2065 515,2125 515,2415 545,2445 715,2445 875,2445 905,2475 905,2820 875,2850 545,2850 440,2850 405,2815 405,2740 370,2705 0,2705 ; 0,2880 0,3215 80,3295 80,3725 325,3725 325,3970 3750,3970 3750,3700 4020,3700 4020,3355 4020,2785 3945,2710 3945,2485 4025,2405 4025,1655 4025,345 3981.3,345 3755,345 3755,80 350,80 350,171.3 350,345 80,345 80,2040 125,2040
Power Plane (plane layer: these items are gaps in the copper):
  lines w10: 0,0 1.05,940 3580,940 3580,1375 4095,1375 4095,1290 ; 10,3680 10,3445 300,3445 300,3440 300,3245 495,3245 730,3245 765,3245 765,3055 795,3025 2680,3025 2895,3025 2895,3185 2940,3230 3595,3230 3595,2765 ; 1980,4050 2005,4025 2005,3615 2200,3615 2310,3615 4100,3615 ; 2490,3025 2490,2805 2795,2805 2835,2765 3595,2765 ; 3595,2850 3595,2765 ; 4100,2870 4100,2775 4090,2765 4090,2625 3715,2625 3715,2765 3635,2765 3595,2765

## Silkscreen, mask and mechanical layers (free items; w line width, h text height)
Top Overlay:
  lines w10: 3650,3170 3680,3170 3720,3170 ; 3685,2930 3685,3000 ; 3685,3135 3685,3205 ; 3730,3745 3770,3745 ; 3750,3725 3750,3765
  lines w15: 3655,1190 3685,1190 3725,1190 ; 3690,950 3690,1020 ; 3690,1155 3690,1225
  text "HEATBED" at 3430,3930 h75
  text "HEAT-0" at 905,3620 h100
  text "HEAT-1" at 1305,3620 h100
  text "AUX" at 1770,3610 h100
  text "HEATBED" at 2155,3610 h100
  text "MOSFETs" at 3420,3610 h75
  text "FAN-0" at 115,3350 h100
  text "FAN-1" at 365,3325 h100
  text "GPIO" at 580,3130 h90
  text "SERIAL EXP" at 1945,2980 h90
  text "X" at 3195,2035 h90
  text "Z" at 4025,2035 h90
  text "Y" at 3620,2030 h90
  text "MTRs" at 1125,1920 h90 r270
  text "MAX" at 2835,1815 h120 r90
  text "SRL/MMC" at 1128.79,1655 h90 r270
  text "MIN" at 2840,1620 h120 r90
  text "ERASE" at 2405,1465 h75
  text "MTR PWR" at 3635,860 h90 r90
  text "E1" at 2605,270 h150
  text "E0" at 3200,270 h150
  text "X" at 380,265 h150
  text "Y" at 960,265 h150
  text "Z" at 1550,265 h150
Bottom Overlay:
  drawing of 7 lines, arcs and shapes, not listed
  text "G" at 11640.52,4072.26 h310
  text "SPI MOSI" at 2260,3310 h90 r90
  text "SPI MISO" at 2360,3295 h90 r90
  text "I2C SDA" at 2155,3265 h90 r90
  text "3V3 DC" at 2455,3215 h90 r90
  text "RX" at 2055,3090 h90 r90
  text "GND" at 2455,2775 h90 r90
  text "TX" at 2055,2765 h90 r90
  text "I2C SCL" at 2155,2765 h90 r90
  text "SPI SCLK" at 2355,2765 h90 r90
  text "SPI CS EXP1" at 2260,2760 h90 r90
  text "Y-MIN" at 3590,2190 h90 r90
  text "I2C_SDA" at -780,2120 h90 r270
  text "MSIO" at -680,2120 h90 r270
  text "MOSI" at -580,2115 h90 r270
  text "RXD0" at -480,2115 h90 r270
  text "MCDZ0" at -385,2110 h90 r270
  text "MCCK" at -285,2110 h90 r270
  text "3V3" at 3390,2110 h90 r90
  text "MCCDZ" at -185,2105 h90 r270
  text "3V3" at -85,2105 h90 r270
  text "GND" at 2970,2075 h90 r180
  text "Z-MIN" at 4070,2070 h90 r90
  text "X-MIN" at 3240,2055 h90 r90
  text "3V3" at 2910,2025 h90 r90
  text "3V3" at 3735,2025 h90 r90
  text "GND" at 3895,2000 h90 r270
  text "GND" at 3440,1980 h90 r270
  text "Y-MAX" at 3325,1835 h90 r90
  text "X-MAX" at 2915,1830 h90 r90
  text "Z-MAX" at 3740,1830 h90 r90
  text "3V3" at 3240,1780 h90 r90
  text "3V3" at 4070,1780 h90 r90
  text "3V3" at 3665,1775 h90 r90
  text "I2C_SCL" at -785,1765 h90 r270
  text "SCLK" at -685,1765 h90 r270
  text "EXP_CS2" at -585,1760 h90 r270
  text "TXD0" at -485,1760 h90 r270
  text "MCDZ1" at -390,1755 h90 r270
  text "MCDZ2" at -290,1755 h90 r270
  text "MCDZ3" at -190,1750 h90 r270
  text "GND" at -90,1750 h90 r270
  text "GND" at 3395,1655 h90 r180
  text "GND" at 2980,1650 h90 r180
  text "GND" at 3810,1650 h90 r180
  text "I2C_SDA" at 185,915 h90 r270
  text "MSIO" at 285,915 h90 r270
  text "MOSI" at 385,910 h90 r270
  text "RXD0" at 485,910 h90 r270
  text "MCDZ0" at 580,905 h90 r270
  text "MCCK" at 680,905 h90 r270
  text "MCCDZ" at 780,900 h90 r270
  text "3V3" at 880,900 h90 r270
  text "I2C_SCL" at 180,560 h90 r270
  text "SCLK" at 280,560 h90 r270
  text "EXP_CS2" at 380,555 h90 r270
  text "TXD0" at 480,555 h90 r270
  text "MCDZ1" at 575,550 h90 r270
  text "MCDZ2" at 675,550 h90 r270
  text "MCDZ3" at 775,545 h90 r270
  text "GND" at 875,545 h90 r270
  text "X-A1" at 430,210 h90 r270
  text "X-A2" at 530,210 h90 r270
  text "Y-A1" at 1020,210 h90 r270
  text "Y-A2" at 1120,210 h90 r270
  text "Z-A1" at 1615,210 h90 r270
  text "Z-A2" at 1715,210 h90 r270
  text "Z-A1" at 2135,210 h90 r270
  text "Z-A2" at 2235,210 h90 r270
  text "E0-A1" at 2725,210 h90 r270
  text "E0-A2" at 2825,210 h90 r270
  text "E1-A1" at 3320,210 h90 r270
  text "E1-A2" at 3420,210 h90 r270
  text "X-B1" at 630,205 h90 r270
  text "X-B2" at 730,205 h90 r270
  text "Y-B1" at 1220,205 h90 r270
  text "Y-B2" at 1320,205 h90 r270
  text "Z-B1" at 1815,205 h90 r270
  text "Z-B2" at 1915,205 h90 r270
  text "Z-B1" at 2335,205 h90 r270
  text "Z-B2" at 2435,205 h90 r270
  text "E0-B1" at 2925,205 h90 r270
  text "E0-B2" at 3025,205 h90 r270
  text "E1-B1" at 3520,205 h90 r270
  text "E1-B2" at 3620,205 h90 r270
Mechanical 15:
  the board outline again, w10

## Dimensions
0,4050 to 4100,4050 on Mechanical 1
0,4050 to 0,0 on Mechanical 1

## Text inside footprints (layer, text, board x,y; h text height)
C7: Top Overlay "+" at 3645.18,745.27 h77.5 r315; Top Overlay "+" at 3583.94,806.52 h77.5 r315
FAN-1: Mechanical 16 "1" at 282.5,3597.5 h62 r180
MAX1_ES1: Mechanical 16 "1" at 2882.5,1610.53 h62
MAX1_ES2: Mechanical 16 "1" at 3712.5,1610.53 h62
MAX1_ES3: Mechanical 16 "1" at 3297.5,1610.53 h62
MIN1_ES1: Mechanical 16 "1" at 3207.5,1975.53 h62 r180
MIN1_ES2: Mechanical 16 "1" at 4037.5,1975.53 h62 r180
MIN1_ES3: Mechanical 16 "1" at 3622.5,1975.53 h62 r180
P2_TR1: Mechanical 16 "1" at 3415.45,2407.03 h62 r180
P2_TR2: Mechanical 16 "1" at 3100.45,2407.03 h62 r180
P2_TR3: Mechanical 16 "1" at 4042.97,2407.97 h62 r180
P2_TR4: Mechanical 16 "1" at 3727.5,2407.5 h62 r180
T1: Top Overlay "1" at 395,3755 h77.5; Top Overlay "2" at 580,3755 h77.5; Top Overlay "3" at 780,3755 h77.5; Top Overlay "4" at 980,3755 h77.5
T2: Top Overlay "2" at 3805,1140 h77.5 r270; Top Overlay "1" at 3805,1325 h77.5 r270
T3: Top Overlay "4" at 3805,3070 h77.5 r270; Top Overlay "3" at 3805,3270 h77.5 r270; Top Overlay "2" at 3805,3470 h77.5 r270; Top Overlay "1" at 3805,3655 h77.5 r270
U3: Top Overlay "TQFP 144" at 1778.05,2228.46 h49.6 r270; Top Overlay "R" at 1833.56,1983.83 h37.2 r270